# EAGLE board CT_schematic (EAGLE 7.6.0)

Size 100 x 80 mm. Coordinates in mm from the lower left corner, seen from the top.
Outline: 0,0 100,0 100,80 0,80 0,0
Copper layers (1*16): Top 0.035mm / dielectric 1.5mm / Bottom 0.035mm
Design rules "default": minimum track width 10mil, minimum drill 24mil, track to track 8mil, track to pad 8mil, pad to pad 8mil, via to via 8mil, smd to smd 8mil, copper to edge 40mil, drill to drill 8mil, minimum pad ring 10mil, minimum via ring 8mil, stop-mask expansion 4mil, vias tented up to drill 0mil, thermal gap 10mil

## Footprints (pad centres in the part's own frame; a part is rotated, then mirrored left to right if it is on the bottom)
C0603 = smd 0.8 x 0.8: 1 -0.762,0; 2 0.762,0
C0402 = smd 0.5 x 0.5: 1 -0.508,0; 2 0.508,0
C1206 = smd 1.3 x 1.6: 1 -1.524,0; 2 1.524,0
C1210 = smd 1.2 x 2.5: 1 -1.524,0; 2 1.524,0
EXV-9H = smd 3.505 x 1.676: 1 -2.857,0; 2 2.857,0
L0603 = smd 0.8 x 0.8: 1 -0.762,0; 2 0.762,0
PJ-037B_PACKAGE = drill 3.7 square: 1 12,0 | drill 3.2 square: 2 6,0
R0603 = smd 0.8 x 0.8: 1 -0.762,0; 2 0.762,0
WLCSP143 = smd 0.25 x 0.25: A1 -1.999,2.405; A2 -1.599,2.405; A3 -1.199,2.405; A4 -0.799,2.405; A5 -0.399,2.405; A6 0.001,2.405; A7 0.401,2.405; A8 0.801,2.405; A9 1.201,2.405; A10 1.601,2.405; A11 2.001,2.405; B1 -1.999,2.005; B2 -1.599,2.005; B3 -1.199,2.005; B4 -0.799,2.005; B5 -0.399,2.005; B6 0.001,2.005; B7 0.401,2.005; B8 0.801,2.005; B9 1.201,2.005; B10 1.601,2.005; B11 2.001,2.005; C1 -1.999,1.605; C2 -1.599,1.605; C3 -1.199,1.605; C4 -0.799,1.605; C5 -0.399,1.605; C6 0.001,1.605; C7 0.401,1.605; C8 0.801,1.605; C9 1.201,1.605; C10 1.601,1.605; C11 2.001,1.605; D1 -1.999,1.205; D2 -1.599,1.205; D3 -1.199,1.205; D4 -0.799,1.205; D5 -0.399,1.205; D6 0.001,1.205; D7 0.401,1.205; D8 0.801,1.205; D9 1.201,1.205; D10 1.601,1.205; D11 2.001,1.205; E1 -1.999,0.805; E2 -1.599,0.805; E3 -1.199,0.805; E4 -0.799,0.805; E5 -0.399,0.805; E6 0.001,0.805; E7 0.401,0.805; E8 0.801,0.805; E9 1.201,0.805; E10 1.601,0.805; E11 2.001,0.805; F1 -1.999,0.405; F2 -1.599,0.405; F3 -1.199,0.405; F4 -0.799,0.405; F5 -0.399,0.405; F6 0.001,0.405; F7 0.401,0.405; F8 0.801,0.405; F9 1.201,0.405; F10 1.601,0.405; F11 2.001,0.405; G1 -1.999,0.005; G2 -1.599,0.005; G3 -1.199,0.005; G4 -0.799,0.005; G5 -0.399,0.005; G6 0.001,0.005; G7 0.401,0.005; G8 0.801,0.005; G9 1.201,0.005; G10 1.601,0.005; G11 2.001,0.005; H1 -1.999,-0.395; H2 -1.599,-0.395; H3 -1.199,-0.395; H4 -0.799,-0.395; H5 -0.399,-0.395; H6 0.001,-0.395; H7 0.401,-0.395; H8 0.801,-0.395; H9 1.201,-0.395; H10 1.601,-0.395; H11 2.001,-0.395; J1 -1.999,-0.795; J2 -1.599,-0.795; J3 -1.199,-0.795; J4 -0.799,-0.795; J5 -0.399,-0.795; J6 0.001,-0.795; J7 0.401,-0.795; J8 0.801,-0.795; J9 1.201,-0.795; J10 1.601,-0.795; J11 2.001,-0.795; K1 -1.999,-1.195; K2 -1.599,-1.195; K3 -1.199,-1.195; K4 -0.799,-1.195; K5 -0.399,-1.195; K6 0.001,-1.195; K7 0.401,-1.195; K8 0.801,-1.195; K9 1.201,-1.195; K10 1.601,-1.195; K11 2.001,-1.195; L1 -1.999,-1.595; L2 -1.599,-1.595; L3 -1.199,-1.595; L4 -0.799,-1.595; L5 -0.399,-1.595; L6 0.001,-1.595; L7 0.401,-1.595; L8 0.801,-1.595; L9 1.201,-1.595; L10 1.601,-1.595; L11 2.001,-1.595; M1 -1.999,-1.995; M2 -1.599,-1.995; M3 -1.199,-1.995; M4 -0.799,-1.995; M5 -0.399,-1.995; M6 0.001,-1.995; M7 0.401,-1.995; M8 0.801,-1.995; M9 1.201,-1.995; M10 1.601,-1.995; M11 2.001,-1.995; N1 -1.999,-2.395; N2 -1.599,-2.395; N3 -1.199,-2.395; N4 -0.799,-2.395; N5 -0.399,-2.395; N6 0.001,-2.395; N7 0.401,-2.395; N8 0.801,-2.395; N9 1.201,-2.395; N10 1.601,-2.395; N11 2.001,-2.395
SOIC-8 = smd 1.6 x 0.6: 1 -2.7,1.905 | smd 1.55 x 0.6: 2 -2.7,0.635; 3 -2.7,-0.635; 4 -2.7,-1.905; 5 2.7,-1.905; 6 2.7,-0.635; 7 2.7,0.635; 8 2.7,1.905
TST-110-05-T-D-RA = drill 1 pad 1.7 square: 1 0,0 | drill 1 pad 1.7: 2 0,2.54; 3 2.54,0; 4 2.54,2.54; 5 5.08,0; 6 5.08,2.54; 7 7.62,0; 8 7.62,2.54; 9 10.16,0; 10 10.16,2.54; 11 12.7,0; 12 12.7,2.54; 13 15.24,0; 14 15.24,2.54; 15 17.78,0; 16 17.78,2.54; 17 20.32,0; 18 20.32,2.54; 19 22.86,0; 20 22.86,2.54
SOT-23-8 = smd 0.4 x 1.2: 1 -0.975,-1.3; 2 -0.325,-1.3; 3 0.325,-1.3; 4 0.975,-1.3; 5 0.975,1.3; 6 0.325,1.3; 7 -0.325,1.3; 8 -0.975,1.3
182-009-MALE = drill 1.194 pad 1.524 octagon: 1 -5.537,10.923; 2 -2.769,10.923; 3 0,10.923; 4 2.769,10.923; 5 5.537,10.923; 6 -4.153,8.08; 7 -1.384,8.08; 8 1.384,8.08; 9 4.153,8.08 | hole 3.048: -12.446,9.501; 12.446,9.501
LBGA-64 = smd 0.559 x 0.559: A1 -3.5,3.5; A2 -2.5,3.5; A3 -1.5,3.5; A4 -0.5,3.5; A5 0.5,3.5; A6 1.5,3.5; A7 2.5,3.5; A8 3.5,3.5; B1 -3.5,2.5; B2 -2.5,2.5; B3 -1.5,2.5; B4 -0.5,2.5; B5 0.5,2.5; B6 1.5,2.5; B7 2.5,2.5; B8 3.5,2.5; C1 -3.5,1.5; C2 -2.5,1.5; C3 -1.5,1.5; C4 -0.5,1.5; C5 0.5,1.5; C6 1.5,1.5; C7 2.5,1.5; C8 3.5,1.5; D1 -3.5,0.5; D2 -2.5,0.5; D3 -1.5,0.5; D4 -0.5,0.5; D5 0.5,0.5; D6 1.5,0.5; D7 2.5,0.5; D8 3.5,0.5; E1 -3.5,-0.5; E2 -2.5,-0.5; E3 -1.5,-0.5; E4 -0.5,-0.5; E5 0.5,-0.5; E6 1.5,-0.5; E7 2.5,-0.5; E8 3.5,-0.5; F1 -3.5,-1.5; F2 -2.5,-1.5; F3 -1.5,-1.5; F4 -0.5,-1.5; F5 0.5,-1.5; F6 1.5,-1.5; F7 2.5,-1.5; F8 3.5,-1.5; G1 -3.5,-2.5; G2 -2.5,-2.5; G3 -1.5,-2.5; G4 -0.5,-2.5; G5 0.5,-2.5; G6 1.5,-2.5; G7 2.5,-2.5; G8 3.5,-2.5; H1 -3.5,-3.5; H2 -2.5,-3.5; H3 -1.5,-3.5; H4 -0.5,-3.5; H5 0.5,-3.5; H6 1.5,-3.5; H7 2.5,-3.5; H8 3.5,-3.5
ABLS-25.000MHZ-B2F-T = smd 5.6 x 2.8: 1 -3.81,0; 2 5.69,0
ASEK = smd 1.4 x 1: 1 -1.1,-0.8; 2 1.1,-0.8; 3 1.1,0.8; 4 -1.1,0.8
WSON-8 = smd 0.3 x 0.6: 1 -0.75,0; 2 0.05,0; 3 0.85,0; 4 1.65,0; 5 1.65,3.8; 6 0.85,3.8; 7 0.05,3.8; 8 -0.75,3.8 | smd 3 x 2.6: PAD 0.45,1.9
SON-6 = smd 0.55 x 0.3: 1 -0.355,0.5 | smd 0.52 x 0.3: 2 -0.37,0; 3 -0.37,-0.5; 4 0.37,-0.5; 5 0.37,0; 6 0.37,0.5
SW_4-1437565-2 = smd 1.4 x 2.1: 1 -2.23,4.55; 2 -2.23,-4.55; 3 2.23,4.55; 4 2.23,-4.55
LGM67K-G1J2-24-Z = smd 0.8 x 1.4: A -2,0; C 0,0
NC7SZ125M5X = smd 1.3 x 0.7: 1 -1.3,0.95; 2 -1.3,0; 3 -1.3,-0.95; 4 1.3,-0.95; 5 1.3,0.95

## Placement (x,y rotation side)
C1  1e-06  [C0603]  -45.72,87.63 0 top  (outside the outline)
C2  1e-07  [C0603]  -49.53,87.63 0 top  (outside the outline)
C3  1e-07  [C0603]  -53.34,87.63 0 top  (outside the outline)
C4  1e-07  [C0603]  -57.15,87.63 0 top  (outside the outline)
C5  1e-07  [C0603]  -60.96,87.63 0 top  (outside the outline)
C6  1e-07  [C0603]  -64.77,87.63 0 top  (outside the outline)
C7  1e-07  [C0603]  -68.58,87.63 0 top  (outside the outline)
C8  1e-07  [C0603]  -72.39,87.63 0 top  (outside the outline)
C9  1e-07  [C0603]  -76.2,87.63 0 top  (outside the outline)
C10  1e-07  [C0603]  -80.01,87.63 0 top  (outside the outline)
C11  1e-07  [C0603]  -83.82,87.63 0 top  (outside the outline)
C12  1e-07  [C0603]  -15.24,92.71 0 top  (outside the outline)
C13  1e-07  [C0603]  -19.05,92.71 0 top  (outside the outline)
C14  1e-07  [C0603]  -22.86,92.71 0 top  (outside the outline)
C15  1e-07  [C0603]  -26.67,92.71 0 top  (outside the outline)
C16  4.7e-06  [C0603]  -34.29,87.63 0 top  (outside the outline)
C17  1e-08  [C0603]  -30.48,92.71 0 top  (outside the outline)
C18  1e-06  [C0603]  -34.29,92.71 0 top  (outside the outline)
C19  2.2e-06  [C0603]  -38.1,87.63 0 top  (outside the outline)
C20  2.2e-06  [C0603]  -41.91,87.63 0 top  (outside the outline)
C21  1e-11  [C0402]  -83.82,92.71 0 top  (outside the outline)
C22  1e-11  [C0402]  -15.24,97.79 0 top  (outside the outline)
C23  1e-08  [C0402]  -19.05,97.79 0 top  (outside the outline)
C24  1e-07  [C0402]  -22.86,97.79 0 top  (outside the outline)
C25  1e-07  [C0402]  -26.67,97.79 0 top  (outside the outline)
C26  1e-06  [C0603]  -38.1,92.71 0 top  (outside the outline)
C27  1e-06  [C0603]  -41.91,92.71 0 top  (outside the outline)
C28  1e-08  [C0402]  -30.48,97.79 0 top  (outside the outline)
C29  1e-08  [C0402]  -34.29,97.79 0 top  (outside the outline)
C30  1e-08  [C0402]  -38.1,97.79 0 top  (outside the outline)
C31  1e-08  [C0402]  -41.91,97.79 0 top  (outside the outline)
C32  1e-05  [C1206]  -41.91,74.93 0 top  (outside the outline)
C33  1e-05  [C1210]  -29.21,76.2 0 top  (outside the outline)
C34  1e-06  [C0603]  -45.72,92.71 0 top  (outside the outline)
C35  1e-05  [C1210]  -35.56,76.2 0 top  (outside the outline)
C36  1e-07  [C0402]  -45.72,97.79 0 top  (outside the outline)
C37  0.0001  [EXV-9H]  -38.1,68.58 0 top  (outside the outline)
C38  0.0001  [EXV-9H]  -49.53,68.58 0 top  (outside the outline)
C39  1e-08  [C0402]  -49.53,97.79 0 top  (outside the outline)
C40  1e-08  [C0402]  -53.34,97.79 0 top  (outside the outline)
C41  1e-08  [C0402]  -57.15,97.79 0 top  (outside the outline)
F1  240.0  [L0603]  -49.53,92.71 0 top  (outside the outline)
J1  PJ-037B  [PJ-037B_PACKAGE]  -81.28,29.21 0 top  (outside the outline)
R2  1000.0  [R0603]  -53.34,92.71 0 top  (outside the outline)
R7  4700.0  [R0603]  -57.15,92.71 0 top  (outside the outline)
R8  4700.0  [R0603]  -60.96,92.71 0 top  (outside the outline)
R9  10000.0  [R0603]  -30.48,82.55 0 top  (outside the outline)
R10  10000.0  [R0603]  -35.56,82.55 0 top  (outside the outline)
R11  10000.0  [R0603]  -40.64,82.55 0 top  (outside the outline)
R12  10000.0  [R0603]  -45.72,82.55 0 top  (outside the outline)
R13  10000.0  [R0603]  -50.8,82.55 0 top  (outside the outline)
R14  10000.0  [R0603]  -55.88,82.55 0 top  (outside the outline)
R15  10000.0  [R0603]  -60.96,82.55 0 top  (outside the outline)
R16  10000.0  [R0603]  -66.04,82.55 0 top  (outside the outline)
R17  120.0  [R0603]  -64.77,92.71 0 top  (outside the outline)
R18  120.0  [R0603]  -68.58,92.71 0 top  (outside the outline)
R19  10000.0  [R0603]  -71.12,82.55 0 top  (outside the outline)
R20  10000.0  [R0603]  -76.2,82.55 0 top  (outside the outline)
R21  10000.0  [R0603]  -81.28,82.55 0 top  (outside the outline)
R22  10000.0  [R0603]  -15.24,87.63 0 top  (outside the outline)
R23  10000.0  [R0603]  -20.32,87.63 0 top  (outside the outline)
R24  100000.0  [R0603]  -71.12,74.93 0 top  (outside the outline)
R25  2231.0  [R0603]  -72.39,92.71 0 top  (outside the outline)
R26  1000.0  [R0603]  -76.2,92.71 0 top  (outside the outline)
R27  100000.0  [R0603]  -76.2,74.93 0 top  (outside the outline)
R28  300000.0  [R0603]  -81.28,74.93 0 top  (outside the outline)
R29  100000.0  [R0603]  -15.24,82.55 0 top  (outside the outline)
R30  10000.0  [R0603]  -25.4,87.63 0 top  (outside the outline)
R31  10000.0  [R0603]  -30.48,87.63 0 top  (outside the outline)
R32  9100.0  [R0603]  -80.01,92.71 0 top  (outside the outline)
R33  680000.0  [R0603]  -20.32,82.55 0 top  (outside the outline)
R34  120000.0  [R0603]  -25.4,82.55 0 top  (outside the outline)
U1  STM32F429ZIY6  [WLCSP143]  -43.18,49.53 0 top  (outside the outline)
U2  AT25010B-SSHL-T  [SOIC-8]  -58.42,49.53 0 top  (outside the outline)
U3  TST-110-05-T-D-RA  [TST-110-05-T-D-RA]  -85.09,57.15 0 top  (outside the outline)
U4  MAX3051EKA+T  [SOT-23-8]  -46.99,74.93 0 top  (outside the outline)
U5  182-009-113R531  [182-009-MALE]  -36.83,6.35 0 top  (outside the outline)
U6  MCP2562-E/SN  [SOIC-8]  -72.39,49.53 0 top  (outside the outline)
U7  182-009-113R531  [182-009-MALE]  -36.83,27.94 0 top  (outside the outline)
U8  mt28ew256aba1HPC-0SIT  [LBGA-64]  -58.42,29.21 0 top  (outside the outline)
U9  ABLS-25.000MHZ-B2F-T  [ABLS-25.000MHZ-B2F-T]  -68.58,68.58 0 top  (outside the outline)
U10  ASEK-32.768KHz-ECST  [ASEK]  -29.21,68.58 0 top  (outside the outline)
U11  LP3878SDX-ADJ/NOPB  [WSON-8]  -30.48,58.42 0 top  (outside the outline)
U12  LP2951ACSDX/NOPB  [WSON-8]  -48.26,58.42 0 top  (outside the outline)
U13  TPS3895ADRYR  [SON-6]  -59.69,96.52 0 top  (outside the outline)
U14  4-1437565-2  [SW_4-1437565-2]  -27.94,49.53 0 top  (outside the outline)
U15  Q65110A2395  [LGM67K-G1J2-24-Z]  -17.78,76.2 0 top  (outside the outline)
U16  nc7sz125m5x  [NC7SZ125M5X]  -52.07,74.93 0 top  (outside the outline)
U17  nc7sz125m5x  [NC7SZ125M5X]  -58.42,74.93 0 top  (outside the outline)
U18  nc7sz125m5x  [NC7SZ125M5X]  -64.77,74.93 0 top  (outside the outline)

## Library data of the parts
C1-C41 F1 J1 R2 R7-R34 U1-U18 = circuit_tree

## Nets
CLK_CRYSTAL_U1_H10: C21.1 U1.H10 U9.1
CLK_CRYSTAL_U1_J11: C22.1 U1.J11 U9.2
CLK_U1_D11: U1.D11 U10.3
GND: C1.2 C2.2 C3.2 C4.2 C5.2 C6.2 C7.2 C8.2 C9.2 C10.2 C11.2 C12.2 C13.2 C14.2 C15.2 C16.2 C17.2 C18.2 C19.2 C20.2 C21.2 C22.2 C23.2 C24.2 C25.2 C26.2 C27.2 C28.2 C29.2 C30.2 C31.2 C32.2 C33.2 C34.2 C35.2 C36.2 C37.2 C38.2 C39.2 C40.2 C41.2 J1.2 R2.2 R11.2 R12.2 R26.2 R29.2 R32.2 R34.2 U1.D2 U1.E7 U1.F5 U1.H2 U1.H3 U1.H7 U1.K10 U2.4 U3.4 U3.6 U3.8 U3.10 U3.12 U3.14 U3.16 U3.18 U3.20 U4.2 U4.8 U5.5 U6.2 U6.8 U7.5 U8.E8 U8.H2 U8.H7 U10.2 U11.3 U11.PAD U12.3 U12.4 U12.PAD U13.2 U15.C U16.2 U16.3 U17.1 U17.3 U18.1 U18.3
NET_U1_A11: R9.1 U1.A11
NET_U1_C9: R10.1 U1.C9
NET_U1_D1: C20.1 U1.D1
NET_U1_H9: R8.1 U1.H9 U18.4
NET_U1_L7: R11.1 U1.L7
NET_U1_L10: C17.1 C18.1 F1.1 U1.L10 U1.L11
NET_U1_N2: C19.1 U1.N2
NET_U1_N9: U15.A
NET_U1_N10: U14.3 U14.4
NET_U1_N11: R12.1 U1.N11
NET_U2_3: R13.1 U2.3
NET_U2_7: R15.1 U2.7
NET_U4_6: R17.2 U4.6
NET_U5_2: R17.2 U4.6 U5.2
NET_U5_3: R17.1 U4.7 U5.3
NET_U6_6: R18.2 U6.6
NET_U7_2: R18.2 U6.6 U7.2
NET_U7_3: R18.1 U6.7 U7.3
NET_U8_B4: R22.1 U8.B4
NET_U8_B5: R7.1 U8.B5 U17.4
NET_U11_1: C31.1 U11.1
NET_U11_6: R25.2 R26.1 U11.6
NET_U11_8: R24.1 U11.8
NET_U12_5: R27.1 U12.5
NET_U12_7: R28.2 R29.1 U12.7
NET_U13_1: R31.1 R32.1 U13.1
NET_U13_3: R33.2 R34.1 U13.3
NET_U13_4: R30.1 U13.4 U16.4 U17.2 U18.2
NET_U14_1: R2.1 U14.1 U14.2
PROC_CAN1_RX: U1.A9 U4.4
PROC_CAN1_TX: U1.B9 U4.1
PROC_CAN2_RX: U1.M2 U6.4
PROC_CAN2_TX: U1.A8 U6.1
PROC_FMC_A0: U1.F11 U8.E2
PROC_FMC_A1: U1.E9 U8.D2
PROC_FMC_A2: U1.F10 U8.C2
PROC_FMC_A3: U1.G11 U8.A2
PROC_FMC_A4: U1.F9 U8.B2
PROC_FMC_A5: U1.F8 U8.D3
PROC_FMC_A6: U1.N7 U8.C3
PROC_FMC_A7: U1.K6 U8.A3
PROC_FMC_A8: U1.L6 U8.B6
PROC_FMC_A9: U1.M6 U8.A6
PROC_FMC_A10: U1.N6 U8.C6
PROC_FMC_A11: U1.K5 U8.D6
PROC_FMC_A12: U1.J1 U8.B7
PROC_FMC_A13: U1.G3 U8.A7
PROC_FMC_A14: U1.G5 U8.C7
PROC_FMC_A15: U1.G6 U8.D7
PROC_FMC_A16: U1.K2 U8.E7
PROC_FMC_A17: U1.H6 U8.B3
PROC_FMC_A18: U1.H5 U8.C4
PROC_FMC_A19: U1.C10 U8.D5
PROC_FMC_A20: U1.B11 U8.D4
PROC_FMC_A21: U1.D9 U8.C5
PROC_FMC_A22: U1.E8 U8.B8
PROC_FMC_A23: U1.D8 U8.C8
PROC_FMC_D0: U1.J2 U8.E3
PROC_FMC_D1: U1.K1 U8.H3
PROC_FMC_D2: U1.B3 U8.E4
PROC_FMC_D3: U1.C4 U8.H4
PROC_FMC_D4: U1.L5 U8.H5
PROC_FMC_D5: U1.M5 U8.E5
PROC_FMC_D6: U1.N5 U8.H6
PROC_FMC_D7: U1.J4 U8.E6
PROC_FMC_D8: U1.K4 U8.F3
PROC_FMC_D9: U1.L4 U8.G3
PROC_FMC_D10: U1.N4 U8.F4
PROC_FMC_D11: U1.M4 U8.G4
PROC_FMC_D12: U1.L3 U8.F5
PROC_FMC_D13: U1.L2 U8.G6
PROC_FMC_D14: U1.M1 U8.F6
PROC_FMC_D15: U1.H4 U8.G7
PROC_FMC_NBL0: R23.1 U1.B10 U8.F7
PROC_FMC_NE2: R19.1 U1.E5 U8.F2
PROC_FMC_NOE: R20.1 U1.B5 U8.G2
PROC_FMC_NWAIT: U1.F4 U8.A4
PROC_FMC_NWE: R21.1 U1.A4 U8.A5
PROC_SPI1_MISO: U1.C7 U2.2
PROC_SPI1_MOSI: U1.C8 U2.5
PROC_SPI1_NSS: R14.1 U1.C2 U2.1
PROC_SPI1_SCK: U1.M9 U2.6
PROC_SYS_JTCK_SWCLK: U1.B1 U3.9
PROC_SYS_JTDO_SWO: U1.B7 U3.13
PROC_SYS_JTMS_SWDIO: U1.D3 U3.7
RST_OUT_U3_SRESET_B: R16.1 U3.15 U16.1
VCC_S1_8V5: C32.1 C34.1 C37.1 C38.1 J1.1 R24.2 U11.4 U12.8
VCC_TIER1_3V3: C1.1 C2.1 C3.1 C4.1 C5.1 C6.1 C7.1 C8.1 C9.1 C10.1 C11.1 C12.1 C13.1 C14.1 C15.1 C16.1 C23.1 C24.1 C25.1 C27.1 C28.1 C29.1 C30.1 C33.1 C36.1 C39.1 C40.1 C41.1 F1.2 R7.2 R8.2 R9.2 R10.2 R13.2 R14.2 R15.2 R16.2 R19.2 R20.2 R21.2 R22.2 R23.2 R25.1 R30.2 R31.2 R33.1 U1.A1 U1.C1 U1.C5 U1.C11 U1.D7 U1.E6 U1.E10 U1.G1 U1.G7 U1.J5 U1.J6 U1.J7 U1.J8 U1.L1 U2.8 U3.1 U4.3 U6.5 U8.D8 U8.F1 U8.G5 U10.4 U11.5 U13.6 U16.5 U17.5 U18.5
VCC_TIER1_5V0: C26.1 C35.1 R27.2 R28.1 U6.3 U12.1

## Tracks (layer width: path | path; a pad name or v marks a point on that pad's centre or on a via)
CLK_CRYSTAL_U1_H10  (2 unrouted)
CLK_CRYSTAL_U1_J11  (2 unrouted)
CLK_U1_D11  (1 unrouted)
GND  (88 unrouted)
NET_U1_A11  (1 unrouted)
NET_U1_C9  (1 unrouted)
NET_U1_D1  (1 unrouted)
NET_U1_H9  (2 unrouted)
NET_U1_L7  (1 unrouted)
NET_U1_L10  (4 unrouted)
NET_U1_N2  (1 unrouted)
NET_U1_N10  (1 unrouted)
NET_U1_N11  (1 unrouted)
NET_U2_3  (1 unrouted)
NET_U2_7  (1 unrouted)
NET_U4_6  (1 unrouted)
NET_U5_2  (2 unrouted)
NET_U5_3  (2 unrouted)
NET_U6_6  (1 unrouted)
NET_U7_2  (2 unrouted)
NET_U7_3  (2 unrouted)
NET_U8_B4  (1 unrouted)
NET_U8_B5  (2 unrouted)
NET_U11_1  (1 unrouted)
NET_U11_6  (2 unrouted)
NET_U11_8  (1 unrouted)
NET_U12_5  (1 unrouted)
NET_U12_7  (2 unrouted)
NET_U13_1  (2 unrouted)
NET_U13_3  (2 unrouted)
NET_U13_4  (4 unrouted)
NET_U14_1  (2 unrouted)
PROC_CAN1_RX  (1 unrouted)
PROC_CAN1_TX  (1 unrouted)
PROC_CAN2_RX  (1 unrouted)
PROC_CAN2_TX  (1 unrouted)
PROC_FMC_A0  (1 unrouted)
PROC_FMC_A1  (1 unrouted)
PROC_FMC_A2  (1 unrouted)
PROC_FMC_A3  (1 unrouted)
PROC_FMC_A4  (1 unrouted)
PROC_FMC_A5  (1 unrouted)
PROC_FMC_A6  (1 unrouted)
PROC_FMC_A7  (1 unrouted)
PROC_FMC_A8  (1 unrouted)
PROC_FMC_A9  (1 unrouted)
PROC_FMC_A10  (1 unrouted)
PROC_FMC_A11  (1 unrouted)
PROC_FMC_A12  (1 unrouted)
PROC_FMC_A13  (1 unrouted)
PROC_FMC_A14  (1 unrouted)
PROC_FMC_A15  (1 unrouted)
PROC_FMC_A16  (1 unrouted)
PROC_FMC_A17  (1 unrouted)
PROC_FMC_A18  (1 unrouted)
PROC_FMC_A19  (1 unrouted)
PROC_FMC_A20  (1 unrouted)
PROC_FMC_A21  (1 unrouted)
PROC_FMC_A22  (1 unrouted)
PROC_FMC_A23  (1 unrouted)
PROC_FMC_D0  (1 unrouted)
PROC_FMC_D1  (1 unrouted)
PROC_FMC_D2  (1 unrouted)
PROC_FMC_D3  (1 unrouted)
PROC_FMC_D4  (1 unrouted)
PROC_FMC_D5  (1 unrouted)
PROC_FMC_D6  (1 unrouted)
PROC_FMC_D7  (1 unrouted)
PROC_FMC_D8  (1 unrouted)
PROC_FMC_D9  (1 unrouted)
PROC_FMC_D10  (1 unrouted)
PROC_FMC_D11  (1 unrouted)
PROC_FMC_D12  (1 unrouted)
PROC_FMC_D13  (1 unrouted)
PROC_FMC_D14  (1 unrouted)
PROC_FMC_D15  (1 unrouted)
PROC_FMC_NBL0  (2 unrouted)
PROC_FMC_NE2  (2 unrouted)
PROC_FMC_NOE  (2 unrouted)
PROC_FMC_NWAIT  (1 unrouted)
PROC_FMC_NWE  (2 unrouted)
PROC_SPI1_MISO  (1 unrouted)
PROC_SPI1_MOSI  (1 unrouted)
PROC_SPI1_NSS  (2 unrouted)
PROC_SPI1_SCK  (1 unrouted)
PROC_SYS_JTCK_SWCLK  (1 unrouted)
PROC_SYS_JTDO_SWO  (1 unrouted)
PROC_SYS_JTMS_SWDIO  (1 unrouted)
RST_OUT_U3_SRESET_B  (2 unrouted)
VCC_S1_8V5  (7 unrouted)
VCC_TIER1_3V3  (72 unrouted)
VCC_TIER1_5V0  (5 unrouted)